# Altium PCB PCB_Arduino with Sensors_2022-03-25.pcbdoc
Units mil, origin at the board's own origin, x right, y up, seen from the top; angles counter-clockwise.
Board outline 6905 x 4970 mil, 2 copper layers (Top Layer, Bottom Layer); 1 components, 18 nets, 46 pads, 0 vias.
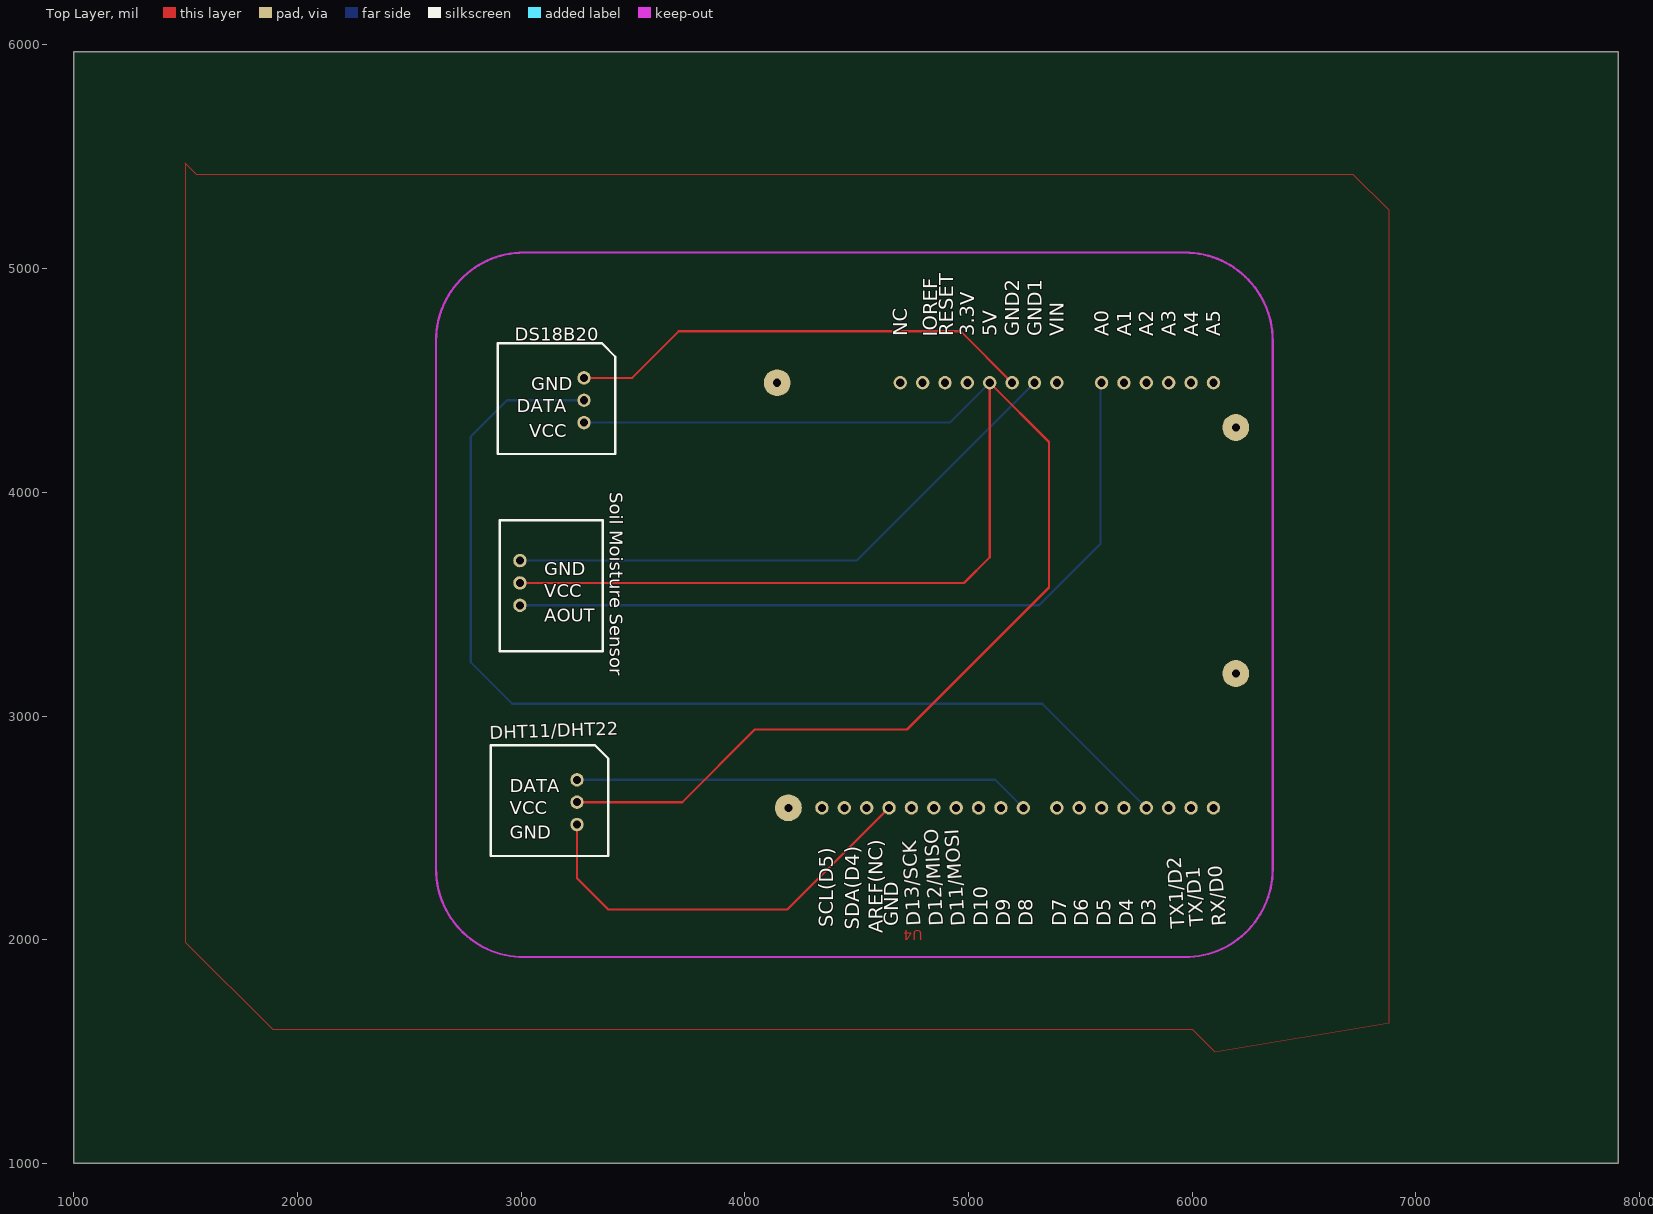
[diagram p0: Top Layer view]
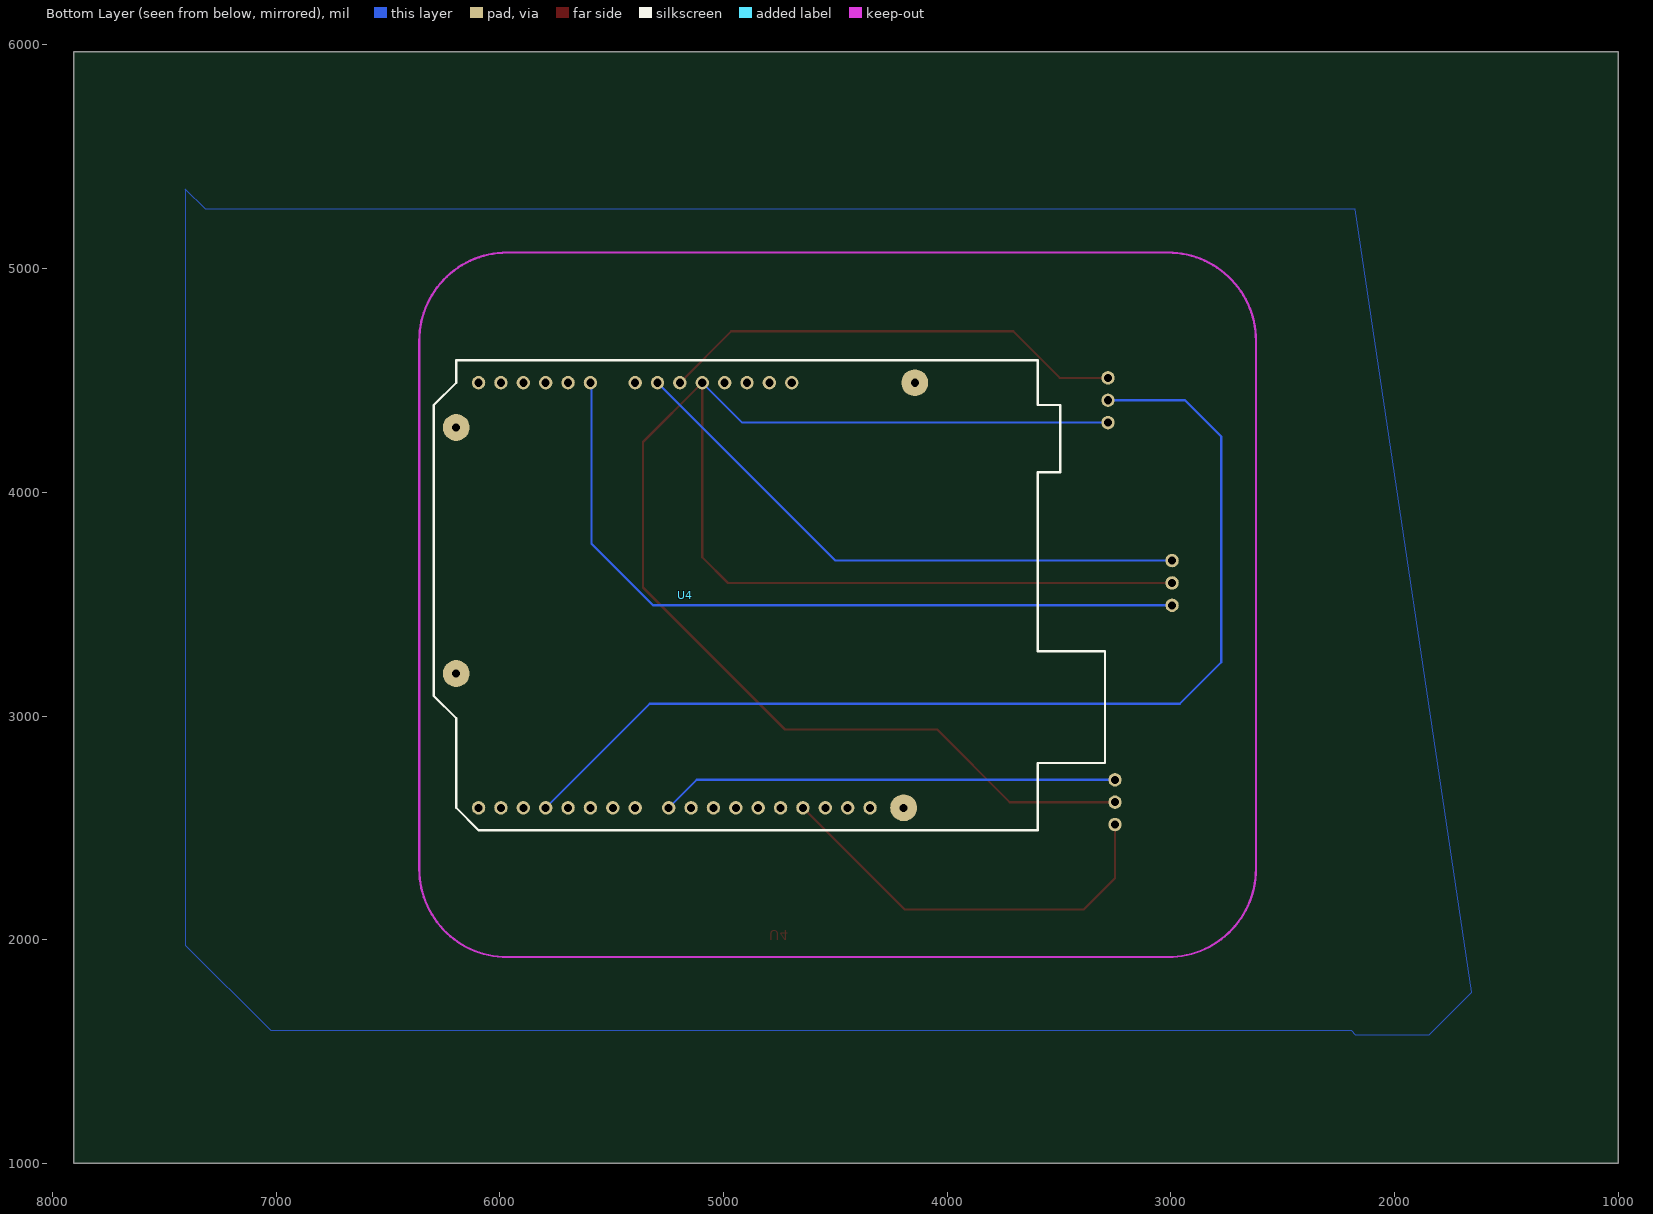
[diagram p1: Bottom Layer view, seen from below]

## Layer stack, top to bottom
Top Layer: signal copper (thickness not stored)
Dielectric: dielectric 12.6, FR-4, Dk 4.8
Bottom Layer: signal copper (thickness not stored)

## Board outline
7905,1000 1000,1000 1000,5970 7905,5970

## Components (designator, comment, footprint, x,y, rotation, side; value= is the part's Value field where it differs from the comment)
U4 "ARDUINO UNO_PERSONAL" "ARDUINO UNO_PERSONAL" 4945,3540 r180 bottom

## Footprints (in the part's own frame and the unit in brackets; to place one, negate y for a bottom-side part, rotate by r counter-clockwise, add the part's x,y. Pads: shape width x height; smd on the part's side, far side on the other; paste and mask are expansions set on the pad)
"ARDUINO UNO_PERSONAL" [mil]
  round 60 hole 35.98: 1(250,950) 2(150,950) 3(50,950) 4(-50,950) 5(-150,950) 6(-250,950) 7(-350,950) 8(-450,950) 9(-650,950) 10(-750,950) 11(-850,950) 12(-950,950) 13(-1050,950) 14(-1150,950) 15(-1150,-950) 16(-1050,-950) 17(-950,-950) 18(-850,-950) 19(-750,-950) 20(-650,-950) 21(-550,-950) 22(-450,-950) 23(-300,-950) 24(-200,-950) 25(-100,-950) 26(0,-950) 27(100,-950) 28(200,-950) 29(300,-950) 30(400,-950) 31(500,-950) 32(600,-950)
  round 120 hole 36: 18(750,-950) 35(-1250,-350) 35(-1250,750) 36(800,950)
  round 60 hole 36: PD4(-750,-950)
  silkscreen extent -1350,-1050 1650,1050

## Free pads (board coordinates)
  round 60 hole 35.98: 1(2995,3695) 1(3250,2715) 1(3281.3,4511.69) 2(2995,3595) 2(3250,2615) 2(3281.3,4411.69) 3(2995,3495) 3(3250,2515) 3(3281.3,4311.69)

## Nets (pads, with @x,y where several pads share a name; then routed paths per layer and width w, separated by ;. In a path a pad name is that pad's centre, name@x,y a point inside that pad or via, vN(x,y) a via of type N, cw(c..) or ccw(c..) an arc to the next point about the centre after c; other vN are vias at no path point)
A0: U4.9
A1: U4.10
AOUT: pad.3@2995,3495
DATA: pad.1@3250,2715 U4.23 | length 2046.8
  Bottom Layer w10: pad.1@3250,2715 5120,2715 U4.23
DSDATA: pad.2@3281.3,4411.69 U4.18@5795,2590 | length 4872.5
  Bottom Layer w10: pad.2@3281.3,4411.69 2936.69,4411.69 2775,4250 2775,3240 2960,3055 5330,3055 U4.18@5795,2590
GND: pad.1@2995,3695 pad.1@3281.3,4511.69 pad.3@3250,2515 U4.6 U4.7 U4.29 | length 6606
  Top Layer w10: pad.3@3250,2515 3250,2275 3390,2135 4190,2135 U4.29 ; pad.1@3281.3,4511.69 3496.69,4511.69 3705,4720 4965,4720 U4.6
  Bottom Layer w10: pad.1@2995,3695 4500,3695 U4.7
IOREF: U4.2
S$61: 
S$1182:  | length 2927.6
  Top Layer w10: 2995,3595 4980,3595 5095,3710 5095,4490
S$1184: U4.16
S$1186: U4.15
S$1453: U4.32
S$1457: U4.31
S$4171: 
S$4199: 
S$5280:  | length 3431
  Bottom Layer w10: 2995,3495 5315,3495 5590,3770 5590,4485 5595,4490
VCC: pad.2@2995,3595 pad.2@3250,2615 pad.3@3281.3,4311.69 U4.5 | length 5420
  Top Layer w10: pad.2@3250,2615 3720,2615 4045,2940 4725,2940 5360,3575 5360,4225 U4.5
  Bottom Layer w10: pad.3@3281.3,4311.69 4916.69,4311.69 U4.5
VIN: U4.8
pads on no net: U4.1 U4.3 U4.4 U4.11 U4.12 U4.13 U4.14 U4.17 U4.18@4195,2590 U4.19 U4.20 U4.21 U4.22 U4.24 U4.25 U4.26 U4.27 U4.28 U4.30 U4.35 U4.36 U4.PD4

## Polygon pours and split planes (outlines as drawn)
GND on Bottom Layer (solid): 2175,5265 7315,5265 7405,5355 7405,1975 7025,1595 2195,1595 2175,1575 1845,1575 1655,1765
GND on Top Layer (solid): 6880,1630 6880,5260 6720,5420 1550,5420 1500,5470 1500,1990 1890,1600 6000,1600 6100,1500

## Keep-outs
Keep-Out Layer:
  lines w10: 2620,2316.1 ccw(c3013.7,2316.1) 3013.7,1922.4 ; 2620,4678.31 cw(c3013.7,4678.31) 3013.7,5072.01 ; 5966.46,1922.4 ccw(c5966.46,2316.1) 6360.16,2316.1 ; 5966.46,5072.01 cw(c5966.46,4678.31) 6360.16,4678.31

## Silkscreen, mask and mechanical layers (free items; w line width, h text height)
Top Overlay:
  lines w10 net S$4171: 2865,2375 3390,2375 3390,2810 3330,2870 2865,2870 2865,2375 ; 2896.3,4171.69 3421.3,4171.69 3421.3,4606.69 3361.3,4666.69 2896.3,4666.69 2896.3,4171.69
  lines w10 net S$4199: 2905,3290 3365,3290 3365,3875 2905,3875 2905,3290
  text "DS18B20" at 2971.3,4677.16 h59.05
  text "GND" at 3044.6,4457.16 h59.05
  text "DATA" at 2981.3,4357.16 h59.05
  text "VCC" at 3036.6,4247.16 h59.05
  text "Soil Moisture Sensor" at 3395.47,4000 h59.05 r270
  text "GND" at 3103.3,3630.47 h59.05
  text "VCC" at 3103.3,3530.47 h59.05
  text "AOUT" at 3103.3,3420.47 h59.05
  text "DHT11/DHT22" at 2861.03,2895.49 h59.05 r2
  text "DATA" at 2950,2660.47 h59.05
  text "VCC" at 2950,2560.47 h59.05
  text "GND" at 2950,2450.47 h59.05
Document:
  lines w0.1: 4452.49,3484.99 4452.51,3485.01

## Text inside footprints (layer, text, board x,y; h text height)
U4: Top Overlay "RX/D0" at 6151.42,2062.2 h62.99 r94; Top Overlay "TX/D1" at 6051.42,2062.2 h62.99 r94; Top Overlay "TX1/D2" at 5966.45,2051.65 h62.99 r93; Top Overlay "D3" at 5836.5,2060 h62.99 r90; Top Overlay "D4" at 5736.5,2060 h62.99 r90; Top Overlay "D5" at 5636.5,2060 h62.99 r90; Top Overlay "D6" at 5536.5,2060 h62.99 r90; Top Overlay "D7" at 5436.5,2060 h62.99 r90; Top Overlay "D8" at 5286.5,2060 h62.99 r90; Top Overlay "D9" at 5186.5,2060 h62.99 r90; Top Overlay "D10" at 5086.5,2060 h62.99 r90; Top Overlay "D11/MOSI" at 4986.42,2062.2 h62.99 r94; Top Overlay "D12/MISO" at 4886.45,2061.65 h62.99 r93; Top Overlay "D13/SCK" at 4786.45,2061.65 h62.99 r93; Top Overlay "GND" at 4686.5,2060 h62.99 r90; Top Overlay "AREF(NC)" at 4616.5,2030 h62.99 r90; Top Overlay "SDA(D4)" at 4511.5,2045 h62.99 r90; Top Overlay "SCL(D5)" at 4396.5,2055 h62.99 r90; Top Overlay "A5" at 6126.5,4698.7 h62.99 r90; Top Overlay "A4" at 6026.5,4695.8 h62.99 r90; Top Overlay "A3" at 5926.5,4698.7 h62.99 r90; Top Overlay "A2" at 5826.5,4698.7 h62.99 r90; Top Overlay "A1" at 5726.5,4698.7 h62.99 r90; Top Overlay "A0" at 5626.5,4698.7 h62.99 r90; Top Overlay "VIN" at 5426.5,4698.7 h62.99 r90; Top Overlay "GND1" at 5326.5,4698.7 h62.99 r90; Top Overlay "GND2" at 5226.5,4698.7 h62.99 r90; Top Overlay "5V" at 5126.5,4698.7 h62.99 r90; Top Overlay "3.3V" at 5026.5,4698.7 h62.99 r90; Top Overlay "RESET" at 4931.5,4698.7 h62.99 r90; Top Overlay "IOREF" at 4861.5,4695 h62.99 r90; Top Overlay "NC" at 4726.5,4698.7 h62.99 r90